# Altium PCB GateWay.PcbDoc (part 2 of 2)
Units mil, origin at the board's own origin, x right, y up, seen from the top; angles counter-clockwise.
Board outline 3543.31 x 4133.86 mil, 2 copper layers (Top Layer, Bottom Layer); 164 components, 130 nets, 591 pads, 370 vias.
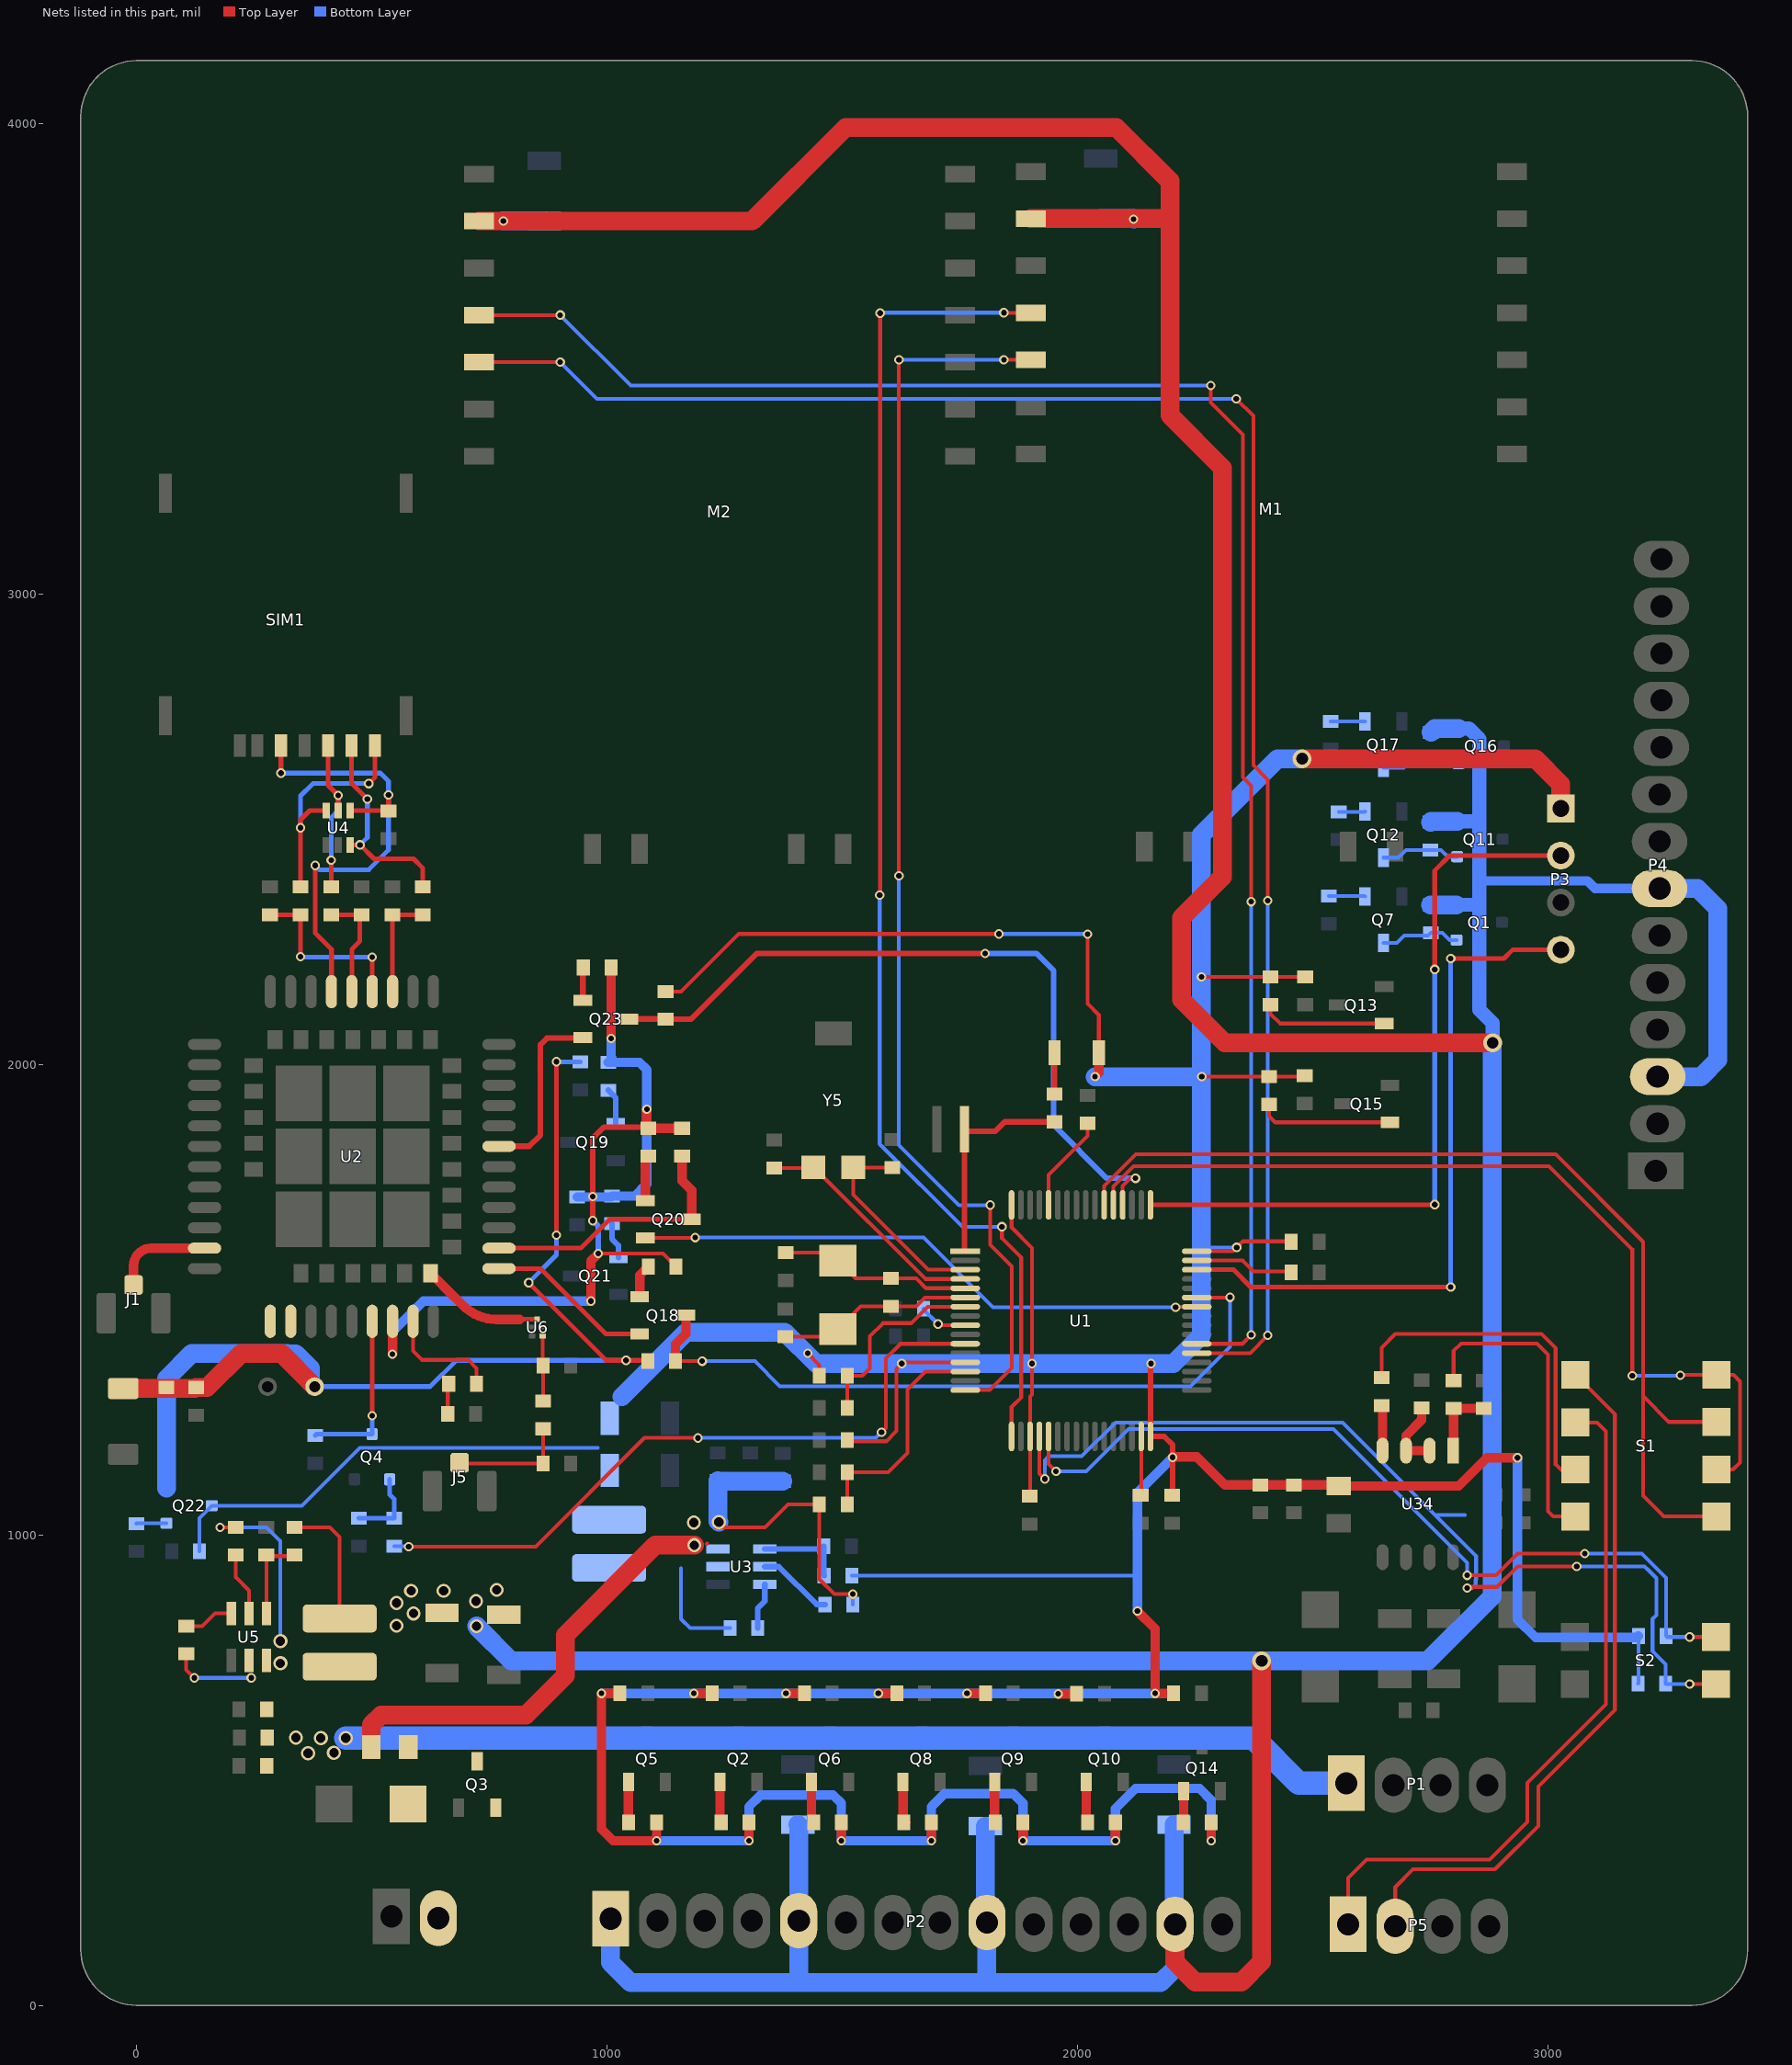
[diagram p2: the nets of this part, all layers, seen from the top]

## Via types
v1: diameter 30, hole 20, Top Layer to Bottom Layer, tented both sides, 220 vias
v2: diameter 20, hole 12, Top Layer to Bottom Layer, tented both sides, 147 vias
v3: diameter 40, hole 25, Top Layer to Bottom Layer, tented both sides, 3 vias

## Nets (pads, with @x,y where several pads share a name; then routed paths per layer and width w, separated by ;. In a path a pad name is that pad's centre, name@x,y a point inside that pad or via, vN(x,y) a via of type N, cw(c..) or ccw(c..) an arc to the next point about the centre after c; other vN are vias at no path point) (continued)
LORA_RXD: M1.3 U1.16 | length 2679.9
  Top Layer w8: v2(1621,2401) v2(1621,3498) ; U1.16@1762,1307.72 1813.72,1307.72 1861,1355 1861,1571 1815,1617 v2(1815,1701) ; v2(1844,3498) 1844.1,3497.9 M1.3@1901.25,3497.9
  Bottom Layer w8: v2(1621,2401) 1621,1829 1749,1701 v2(1815,1701) ; v2(1621,3498) v2(1844,3498)
LORA_RXD2: M2.3 U1.37 | length 3827.1
  Top Layer w8: M2.3@728.25,3492.9 v2@900.9,3492.9 ; U1.37@2254.13,1386.46 2367.46,1386.46 v2(2405,1424) ; v2(2338,3415) 2374.53,3378.47 2374.53,2636 2405,2605.53 v2(2405,2348)
  Bottom Layer w8: v2(901,3493) 979,3415 v2(2338,3415) ; v2(2405,1424) v2(2405,2348)
LORA_TXD: M1.4 U1.17 | length 2891.2
  Top Layer w8: v2(1580,2360) 1581,2361 v2(1581,3597) ; v2(1840,1655) 1840,1630 1881,1589 1881,1492.55 1881,1292.57 1860.43,1272 U1.17@1860.43,1209.3 ; v2(1844,3598) 1844.1,3597.9 M1.4@1901.25,3597.9
  Bottom Layer w8: v2(1580,2360) 1580,1831 1756,1655 v2(1840,1655) ; v2(1581,3597) 1582,3598 v2(1844,3598)
LORA_TXD2: M2.4 U1.38 | length 3800.7
  Top Layer w8: M2.4@728.25,3592.9 v2@900.9,3592.9 ; U1.38@2254.13,1406.15 2351.15,1406.15 v2(2370,1425) ; v2(2284,3443) 2284,3407 2352,3339 2352,2610 2370,2592 v2(2370,2346) v2@2374,2350
  Bottom Layer w8: v2(901,3593) 1051,3443 v2(2284,3443) ; v2(2370,1425) v2(2370,2346)
MODE1: R57.1 S2.3 U1.20 | length 2151.9
  Top Layer w8: U1.20@1919.48,1209.3 1919.48,1130.52 v2(1931,1119) ; v2(2829,887) 2831.37,889.37 2892.37,889.37 2936,933 v2(3062,933) ; v2(3302,683) S2.3@3358,683
  Bottom Layer w8: v2(1931,1119) 1931,1158.83 1939.17,1167 2009.59,1167 2081.59,1239 2174,1239 ; 2200,1239 2174,1239 ; 2824,1042 2760.81,1042 ; v2(2829,887) 2840,887 2847,894 2847,904.13 2848,905.13 2848,954.81 2760.81,1042 ; v2(3062,933) 3206,933 3215.26,923.74 3231,908 3231,829 3223,821 3223,753 3251,725 R57.1@3251,684 3252,683 v2(3302,683) ; 2174,1239 2563.81,1239 2760.81,1042
MODE2: R56.1 S2.4 U1.21 | length 1830.4
  Top Layer w8: U1.21@1939.17,1209.3 1939.17,1150.83 v2(1955,1135) ; v2(2829,914) 2890,914 2936,960 v2(3079,960) ; v2(3302,783) S2.4@3358,783
  Bottom Layer w8: v2(1955,1135) 2018.96,1135 2108.96,1225 2545,1225 2829,941 v2(2829,914) ; v2(3079,960) 3200.32,960 3252,908.32 R56.1@3252,785 3254,783 v2(3302,783)
NBIOT_RXD1: Q18.3 R42.1 U1.43 | length 1519.1
  Top Layer w8: R42.1@1145.98,1369.19 v2(1202.81,1369.19) v2@1203,1369 ; U1.43@2254.13,1504.57 2324.57,1504.57 v2(2325,1505)
  Top Layer w20: R42.1@1145.98,1369.19 1145.98,1404.98 1168.4,1427.4 Q18.3@1168.4,1466.82
  Bottom Layer w8: v2(1202.81,1369.19) 1314.81,1369.19 1368,1316 2241,1316 2325,1400 v2(2325,1505)
NBIOT_TXD1: Q20.2 U1.42 | length 1234.1
  Top Layer w8: Q20.2@1081.98,1631.45 1187.45,1631.45 v2(1188,1632) ; v2(2209,1484) 2209.89,1484.89 U1.42@2254.13,1484.89
  Bottom Layer w8: v2(1188,1632) 1673,1632 1821,1484 v2(2209,1484)
NET_LIGHT: LED3.1 U2.41 | length 246.2
  Top Layer w8: U2.41@587.91,1453.98 587.91,1391.09 607,1372 705,1372 722.98,1354.02 LED3.1@722.98,1321.19
NetC1_2: C1.2 R34.2 U1.6 Y1.2 | length 417.6
  Top Layer w8: C1.2@1379,1420.94 1474.61,1420.94 Y1.2@1491,1437.33 1539.61,1485.94 R34.2@1604,1485.94 1657.94,1485.94 1676.57,1504.57 U1.6@1762,1504.57
NetC2_2: C2.2 R34.1 U1.5 Y1.1 | length 413.4
  Top Layer w8: C2.2@1380,1600.06 1473.94,1600.06 Y1.1@1491,1583 1529,1545 R34.1@1604,1545 1658,1545 1678.74,1524.26 U1.5@1762,1524.26
NetC7_2: C7.2 U1.31 | length 125.7
  Top Layer w8: C7.2@2135,1084.06 2136.02,1085.07 U1.31@2136.02,1209.3
NetC10_1: C10.1 J5.1 R17.2 | length 252.1
  Top Layer w8: J5.1@686.98,1153.23 688.82,1151.39 C10.1@864.32,1151.39 R17.2@864.32,1225.33
NetC15_2: C15.2 U1.3 Y5.1 | length 445
  Top Layer w8: C15.2@1607,1780.94 1606.94,1781 Y5.1@1524,1781 1524,1723 1683.37,1563.63 U1.3@1762,1563.63
NetC19_2: C19.2 U1.47 | length 211.3
  Top Layer w8: U1.47@2254.13,1583.32 2351.68,1583.32 2375,1560 2452.94,1560 C19.2@2454.94,1558
NetC20_2: C20.2 U1.4 Y5.2 | length 504.6
  Top Layer w8: C20.2@1356,1779.94 1437.94,1779.94 Y5.2@1439,1781 1440.38,1781 1677.44,1543.94 U1.4@1762,1543.94
NetC23_1: C23.1 R17.1 U6.4 | length 139.2
  Top Layer w8: U6.4@863.64,1423.3 863.64,1360.07 C23.1@864.32,1359.39 R17.1@864.32,1284.39
NetC29_1: C29.1 L2.1 U3.2 | length 219.9
  Bottom Layer w8: 1158,929 1158,821 1177,802 C29.1@1262,802
NetC29_2: C29.2 U3.6 | length 99.2
  Bottom Layer w12: C29.2@1321.06,802 C29.2@1321.06,802 1321,844 1336,859 U3.6@1336,895
NetC35_1: C35.1 L1.1 U5.2 | length 183.3
  Top Layer w8: C35.1@106,747 106,713 v2(123,696) ; v2(244,696) v2@247,699
  Bottom Layer w8: v2(123,696) v2(244,696)
NetC35_2: C35.2 U5.6 | length 107.2
  Top Layer w8: C35.2@106,806.06 140.06,806.06 167,833 U5.6@202,833
NetD1_2: D1.2 F2.1 Q3.3
NetD2_2: D2.2 R8.1 | length 88.2
  Top Layer w12: D2.2@1951.51,2025 1952,2024.51 R8.1@1952,1937
NetJ1_1: J1.1 U2.32 | length 213.2
  Top Layer w20: J1.1@-6.02,1531.23 -6.02,1571.98 cw(c31.5,1572) 31.5,1609.5 U2.32@144.99,1609.5
NetLED3_2: LED3.2 R38.1 | length 64.8
  Top Layer w8: R38.1@661.98,1257.19 661.98,1319.24 LED3.2@663.92,1321.19
NetP5_1: P5.1 S1.6 | length 1501.3
  Top Layer w8: P5.1@2576,172 2576,271 2615,310 2877,310 2957,390 2957,473 3124,640 3124,1220 3105,1239 S1.6@3059,1239
NetP5_2: P5.2 S1.5 | length 1502.1
  Top Layer w8: P5.2@2676,168.06 2676,251 2714,289 2888,289 2980,381 2980,465 3143,628 3143,1256 S1.5@3059,1340
NetQ1_1: Q1.1 Q7.3 R31.1 | length 170.7
  Bottom Layer w8: Q7.3@2650.91,2258.57 2679.25,2258.57 2695,2274.32 2745.86,2274.32 R31.1@2751.54,2280 2776,2280 2791.4,2264.6 Q1.1@2806.31,2264.6
NetQ2_1: Q2.1 R1.1 | length 87
  Top Layer w20: Q2.1@1240.6,475 1240.6,391.51 R1.1@1243.11,389
NetQ4_1: Q4.1 R16.1 R18.1 | length 161.7
  Bottom Layer w10: R18.1@472.98,1035.19 R16.1@547.98,1035.19 547.98,1076.02 538.38,1085.62 Q4.1@538.38,1117.96
NetQ5_1: Q5.1 R24.1 | length 86.3
  Top Layer w20: Q5.1@1046,475 1046,389.61 R24.1@1046.61,389
NetQ6_1: Q6.1 R2.1 | length 87.8
  Top Layer w20: Q6.1@1435.2,475 1435.2,393.41 R2.1@1439.61,389
NetQ7_1: Q7.1 R3.2 | length 77.4
  Bottom Layer w8: R3.2@2534.54,2358.06 2610.48,2358.06 Q7.1@2611.54,2357
NetQ8_1: Q8.1 R4.1 | length 88.6
  Top Layer w20: Q8.1@1629.8,475 1629.8,395.31 R4.1@1636.11,389
NetQ9_1: Q9.1 R5.1 | length 77.8
  Top Layer w20: R5.1@1824.4,397.21 Q9.1@1824.4,475
NetQ10_1: Q10.1 R6.1 | length 75.9
  Top Layer w20: R6.1@2019,399.11 Q10.1@2019,475
NetQ11_1: Q11.1 Q12.3 R11.1 | length 169.6
  Bottom Layer w8: Q12.3@2650.91,2439.57 2682.25,2439.57 2698.68,2456 R11.1@2751,2456 2773,2456 2787.4,2441.6 Q11.1@2807.77,2441.6
NetQ12_1: Q12.1 R12.2 | length 55.9
  Bottom Layer w8: R12.2@2556,2537.06 2610.59,2537.06 Q12.1@2611.54,2538
NetQ13_1: Q13.1 R13.1 | length 270.1
  Top Layer w8: R13.1@2410.68,2127 2410.68,2107.32 2431,2087 Q13.1@2652.68,2087
NetQ14_1: Q14.1 R20.1 | length 66.2
  Top Layer w20: R20.1@2225.61,389 2226,389.39 Q14.1@2226,455
NetQ15_1: Q15.1 R21.1 | length 287.2
  Top Layer w8: R21.1@2407.68,1915 2407.68,1890.32 2421.06,1876.94 Q15.1@2664.68,1876.94
NetQ16_1: Q16.1 Q17.3 R30.1 | length 169.7
  Bottom Layer w8: Q17.3@2650.91,2630.57 2694.21,2630.57 2709.96,2646.32 2751.32,2646.32 R30.1@2752,2647 2803.37,2647 Q16.1@2810.77,2639.6
NetQ17_1: Q17.1 R32.2 | length 72.6
  Bottom Layer w8: R32.2@2539,2729.06 2611.48,2729.06 Q17.1@2611.54,2729
NetQ18_1: Q18.1 R40.1 | length 71.5
  Top Layer w20: Q18.1@1069.98,1506.19 1069.98,1552.19 R40.1@1087.98,1570.19
NetQ19_1: Q19.1 R41.1 | length 77.6
  Bottom Layer w12: R41.1@1002.98,1945.19 1018.98,1929.19 Q19.1@1018.98,1874.19
NetQ20_1: Q20.1 R44.1 | length 97.5
  Top Layer w20: Q20.1@1081.98,1710.19 1081.98,1799.19 R44.1@1087.98,1805.19
NetQ21_1: Q21.1 R45.1 | length 77.1
  Bottom Layer w12: R45.1@1010.98,1661.19 1010.98,1629.02 1024.53,1615.47 Q21.1@1024.53,1589.69
NetQ22_1: Q22.1 R52.2 | length 64
  Bottom Layer w8: R52.2@0,1024.06 0.54,1024.6 Q22.1@63.77,1024.6
NetQ23_1: Q23.1 R61.1 | length 70.4
  Top Layer w12: Q23.1@949,2136 949,2205 R61.1@950,2206
NetQ23_3: Q23.3 R62.1 U1.52 | length 1599.3
  Top Layer w8: U1.52@2096.65,1701.43 2096.65,1741.65 2113,1758 v2(2124,1758)
  Top Layer w12: Q23.3@1047.43,2096.63 1124.37,2096.63 R62.1@1125,2096 1178.95,2096 1318.95,2236 v2(1804,2236)
  Bottom Layer w12: v2(1804,2236) 1913,2236 1950,2199 1950,1871 2063,1758 v2(2124,1758)
NetR8_2: R8.2 SBatery.2 U1.1 | length 461
  Top Layer w12: U1.1@1762,1603 1760.5,1604.5 SBatery.2@1760.5,1862 1764.5,1858 1826,1858 1845.94,1877.94 R8.2@1952,1877.94
NetR14_2: R14.2 R33.1 U1.14 | length 486.9
  Top Layer w8: R14.2@1511,1065 R33.1@1511,1133.25 1598.25,1133.25 1639,1174 1639,1309 1677.09,1347.09 U1.14@1762,1347.09
NetR23_2: R23.2 SIM1.2 U4.5 | length 348.4
  Top Layer w10: SIM1.2@407.4,2678 407.4,2593.6 v2(429,2572) U4.5@429,2539.63 ; R23.2@413.98,2377.19 v2@413.98,2434
  Bottom Layer w10: v2(414,2434) 414,2524.63 428.98,2539.61 v2@428.98,2571.98
NetR25_2: R25.2 SIM1.7 U4.3 | length 446.5
  Top Layer w10: U4.3@454.57,2466.77 v2(475.23,2466.77) 505,2437 589,2437 608.98,2417.02 R25.2@608.98,2377.19 ; SIM1.7@457.4,2678 457.4,2597.6 v2(491,2564)
  Bottom Layer w10: v2(475.23,2466.77) 491,2482.54 v2(491,2564)
NetR29_2: R29.2 R48.2 U3.4 | length 190.9
  Bottom Layer w12: U3.4@1336,969.8 1454.75,969.8 R48.2@1460.94,976 1460.94,914 R29.2@1461.94,913
NetR35_1: R35.1 U1.60 | length 207.9
  Top Layer w8: U1.60@1939.17,1701.43 1939.17,1762 1939.17,1765.17 2022,1848 R35.1@2022,1875
NetR39_2: R39.2 SIM1.3 U4.6 | length 516.7
  Top Layer w10: R39.2@348.98,2377.19 348.98,2519.98 368.61,2539.61 U4.6@403.39,2539.61 ; v2(494,2597) 507.4,2610.4 SIM1.3@507.4,2678
  Bottom Layer w10: v2@348.98,2502 348.98,2570.98 375,2597 v2(494,2597)
  other v2: 348.98,2503
NetR49_2: R49.2 U3.5 | length 161.2
  Bottom Layer w12: U3.5@1336,932.4 1365.6,932.4 1446,852 R49.2@1463.94,852
NetR50_2: R50.2 R51.2 U5.4 | length 184.5
  Top Layer w8: U5.4@276.8,833 276.8,952.14 274,954.94 334,954.94 R50.2@335,955.94
NetR53_1: R53.1 U5.5 | length 135.8
  Top Layer w8: R53.1@211,957 211,910 239.4,881.6 U5.5@239.4,833
NetR55_1: R55.1 U34.4 | length 96.8
  Top Layer w20: R55.1@2647,1275 2649,1273 U34.4@2649,1179
NetR55_2: R55.2 S1.7 | length 754.4
  Top Layer w8: R55.2@2647,1334.06 2647,1398 2676,1427 2987,1427 3017,1397 3017,1150 3031,1136 3056,1136 S1.7@3059,1139
NetR58_1: R58.1 U34.2 U34.3 | length 154.7
  Top Layer w20: R58.1@2732,1270 2732,1244 2699,1211 U34.3@2699,1179 U34.2@2749,1179
NetR60_2: R60.2 U1.9 | length 104.7
  Top Layer w8: v2(1704.15,1448.15) 1706.78,1445.52 U1.9@1762,1445.52
  Bottom Layer w8: R60.2@1673.06,1481 1673.06,1479.24 v2(1704.15,1448.15)
NetR137_1: R137.1 R218.1 U34.1 | length 154.4
  Top Layer w20: U34.1@2799,1179 2800,1180 R218.1@2800,1269 R137.1@2864,1269
NetR218_2: R218.2 S1.8 | length 676.1
  Top Layer w8: R218.2@2800,1328.06 2800,1391 2816,1407 2977,1407 3001,1383 3001,1050 3012,1039 S1.8@3059,1039
NetU2_68: U2.68 U6.1 | length 263.6
  Top Layer w10: 815,1458 cw(c816.77,1456.23) 816.77,1458.73 U6.1@852.32,1458.73
  Top Layer w20: U2.68@625.31,1556.35 675.65,1506 676,1506 694.71,1487.29 ccw(c765.42,1558) 765.42,1458 815,1458
PWRKEY: Q4.3 R37.1 U2.39 | length 362.4
  Top Layer w10: v2@501,1253 v2(501.29,1253.29) U2.39@501.29,1453.98
  Bottom Layer w10: R37.1@379.98,1211.19 383.2,1214.42 Q4.3@500.98,1214.42 500.98,1252.98 v2(501.29,1253.29)
RI: Q23.2 U2.7 | length 386.3
  Top Layer w12: U2.7@770.98,1826.03 835.03,1826.03 859,1850 859,2042 873,2056 947.74,2056 Q23.2@949,2057.26
RS485_RXD1: S1.1 S1.3 U1.54 | length 2183.7
  Top Layer w8: U1.54@2057.28,1701.43 2057.28,1741.28 2125,1809 3017,1809 3203,1623 3203,1295 ; S1.1@3359,1039 3247,1039 3203,1083 3203,1295 ; S1.3@3359,1240 3258,1240 3203,1295
RS485_TXD1: S1.2 S1.4 U1.53 | length 1966.6
  Top Layer w8: U1.53@2076.96,1701.43 2076.96,1740.96 2120,1784 3003,1784 3180,1607 v2(3180,1338) ; v2(3282,1339) 3283,1340 S1.4@3359,1340 3395,1340 3409,1326 3409,1154 3394,1139 S1.2@3359,1139
  Bottom Layer w8: v2(3180,1338) 3281,1338 v2(3282,1339)
RST: C13.2 R15.2 U1.7 | length 419.9
  Top Layer w8: C13.2@1511,1269.75 R15.2@1511,1338 1543,1338 1559,1354 1559,1422 1587,1450 1647,1450 1681.89,1484.89 U1.7@1762,1484.89
SIM_CLK: C17.2 R39.1 U2.16 | length 379.9
  Top Layer w10: C17.2@283.98,2318.13 R39.1@348.98,2318.13 v2@348.98,2229.02 ; v2(501,2228) 501.29,2227.71 U2.16@501.29,2154.77
  Bottom Layer w10: v2(349,2229) 350,2228 v2(501,2228)
SIM_DATA: C18.2 R25.1 U2.15 | length 228.6
  Top Layer w10: U2.15@544.6,2154.77 543.98,2155.39 C18.2@543.98,2318.13 R25.1@608.98,2318.13
SIM_PWR: R16.2 U1.11 | length 1479.8
  Top Layer w8: v2(579,975) 849,975 1080,1206 v2(1194,1206) ; v2(1584,1218) 1593,1227 1593,1375 1624.15,1406.15 U1.11@1762,1406.15
  Bottom Layer w8: R16.2@547.98,976.13 577.87,976.13 v2(579,975) ; v2(1194,1206) 1572,1206 v2(1584,1218)
SIM_RST: C16.2 R23.1 U2.17 | length 237.1
  Top Layer w10: R23.1@413.98,2318.13 C16.2@478.98,2318.13 475,2314.16 475,2262 457.98,2244.98 U2.17@457.98,2154.77
SIM_RXD: Q20.3 R46.1 U2.2 | length 577.7
  Top Layer w10: U2.2@770.98,1609.5 944.82,1609.5 1006.14,1670.82 Q20.3@1180.4,1670.82
  Top Layer w20: R46.1@1159.98,1805.19 1159.98,1753.02 1180.4,1732.6 Q20.3@1180.4,1670.82
SIM_TXD: Q18.2 U2.1 | length 356.5
  Top Layer w10: U2.1@770.98,1566.19 858.81,1566.19 997.55,1427.45 Q18.2@1069.98,1427.45
SIM_VBAT: C6.1 C9.2 C24.2 D3.2 Q22.2 R42.2 R43.2 U2.34 U2.35 | length 2637
  Top Layer w10: v2(834,1536) 999,1371 v2(1041,1371) 1085.11,1371 R42.2@1086.92,1369.19 ; v2(893,1637) v2(893,2006)
  Top Layer w40: D3.2@-28.02,1311.19 124.92,1311.19 C9.2@126.98,1313.24 150.24,1313.24 223,1386 308.16,1386 C6.1@378.98,1315.19
  Bottom Layer w10: C6.1@378.98,1315.19 624.46,1315.19 680.27,1371 v2(1041,1371) ; v2(834,1536) 893,1595 v2(893,1637) ; v2(893,2006) 893.76,2005.24 R43.2@943.98,2005.24
  Bottom Layer w40: Q22.2@63.77,1099.4 63.77,1331.77 118,1386 320,1386 321,1385 339,1385 370,1354 370,1324.17 C6.1@378.98,1315.19
SIM_VDD: C14.2 SIM1.1 U2.18 U4.4 | length 1016.3
  Top Layer w10: v2@307,2619 v2(307.4,2619.4) SIM1.1@307.4,2678 ; v2(380,2423) 380,2279.2 414.68,2244.52 U2.18@414.68,2154.77 ; U4.4@454.57,2539.61 535.45,2539.61 C14.2@536,2539.06 v2(536,2573)
  Bottom Layer w10: v2(307.4,2619.4) 518.6,2619.4 536,2602 v2(536,2573) 536,2456 494,2414 389,2414 v2(380,2423)
SWCLK: P3.2 U1.49 | length 1595.8
  Top Layer w10: U1.49@2155.7,1701.43 2759.43,1701.43 v2(2760,1702) ; v2(2760,2202) 2760,2412 2792,2444 P3.2@3028,2444
  Bottom Layer w10: v2(2760,1702) v2(2760,2202)
SWD: P3.4 U1.46 | length 1494.9
  Top Layer w10: U1.46@2254.13,1563.63 2332.38,1563.63 2369.01,1527 v2(2794,1527) ; v2(2794,2225) 2907,2225 2926,2244 P3.4@3028,2244
  Bottom Layer w10: v2(2794,1527) v2(2794,2225)
VCC: C25.2 C26.2 C32.2 C33.2 C34.2 C41.2 F2.2 P1.1 R14.1 R49.1 R53.2 U3.3 U5.3 | length 4229.4
  Top Layer w8: v2(178.06,1016.06) v2(178.06,1016.06) R53.2@211,1016.06 ; 1212,981 1213,982 ; v1@1232,1016 1336,1016 1385,1065 R14.1@1451.94,1065 1451.94,906.06 1484,874 v2(1523,874)
  Top Layer w40: F2.2@499.26,549 499.26,596.26 520,617 828,617 912,701 912,787 1103,978 v1(1186,978)
  Bottom Layer w8: v2(178.06,1016.06) 276.94,1016.06 306,987 v1(306,774) ; R49.1@1523,852 v2(1523,874)
  Bottom Layer w40: v1(1238,1027) 1236,1029 C26.2@1236,1115 1237,1114 C25.2@1374,1114
  Bottom Layer w50: v1(445,568) 2375,568 2471,472 P1.1@2572,472
  other v1: 365,536 420,537 392,568 339,569 306,727 1185,1026
VCC5V_OUT: C4.1 C5.1 C21.1 C22.1 C30.1 C31.1 C40.1 L1.2 M1.6 M2.6 P2.1 P2.5 P2.9 P2.13 P4.3 P4.7 Q1.2 Q11.2 Q16.2 R11.2 R30.2 R31.2 R50.1 | length 13687.3
  Top Layer w8: R50.1@336,1016 411,1016 432,995 L1.2@432,822.18
  Top Layer w40: M2.6@728.25,3792.9 1309,3792.9 1508.1,3992 2083,3992 2197,3878 2197,3793 ; M1.6@1901.25,3797.9 2110,3797.9 ; 2155.1,3797.9 2110,3797.9 ; P2.13@2208,172.19 2208,92 2251,49 2349,49 2392,92 v3(2392,732) ; 2222,2263 2222,2138 ; v3(2883,2046) 2314,2046 2222,2138 ; 2110,3797.9 2192.1,3797.9 2197,3793 ; 2197,3793 2197,3380 2309,3268 2309,2399 2222,2312 2222,2138
  Bottom Layer w20: 2855,2396 2861,2390 3085,2390 3101,2374 P4.7@3237.87,2374
  Bottom Layer w30: Q1.2@2806.31,2339.4 2849.4,2339.4 2855,2345 ; Q11.2@2807.77,2516.4 2854.4,2516.4 2855,2517 ; Q16.2@2810.77,2714.4 2832.6,2714.4 2855,2692 2855,2517 ; v3(2883,2046) 2883,2088 2855,2116 2855,2345 ; 2855,2345 2855,2396 2855,2517
  Bottom Layer w40: v1(723,806) 797,732 v3(2392,732) 2745,732 2882,869 2882,2045 v3(2883,2046) ; v2(780,3793) C22.1@867,3793 ; P2.1@1008,184 1008,91 1051,48 1418,48 ; C4.1@1406,384 1408,382 P2.5@1408,180.06 1408,58 1418,48 ; C40.1@1805,381 1805,179.13 P2.9@1808,176.13 1808,53 1813,48 ; C21.1@2050,3798 2119,3798 v2(2120,3797) ; C5.1@2205.93,384 2205.93,174.26 P2.13@2208,172.19 2208,81 2209,80 2177,48 1813,48 ; R11.2@2751,2515.06 2752.35,2516.4 Q11.2@2807.77,2516.4 ; R31.2@2751.54,2339.06 2751.88,2339.4 Q1.2@2806.31,2339.4 ; R30.2@2752,2706.06 2760.35,2714.4 Q16.2@2810.77,2714.4 ; P4.7@3237.87,2374 3319,2374 3362,2331 3362,2010 3326,1974 P4.3@3233.94,1974 P4.3@3241.94,1982 ; 1418,48 1813,48
  other v1: 553,807 589,833 553,855 722,859 584,881 653,881 766,883
VCC_3.3V: C3.2 C8.2 C11.2 C12.2 C27.1 C28.1 C89.2 C90.2 D2.1 FB6.2 L2.2 P3.1 Q22.3 R1.2 R2.2 R4.2 R5.2 R6.2 R7.2 R9.2 R10.2 R13.2 R15.1 R19.2 R20.2 R21.2 R22.2 R24.2 R26.2 R27.2 R28.2 R29.1 R36.2 R54.2 R56.2 R57.2 R62.2 U1.13 U1.19 U1.32 U1.48 U1.64 | length 14409.5
  Top Layer w8: R62.2@1125,2155.06 1158.02,2155.06 1280.45,2277.48 v2(1833.52,2277.48) v2@1834,2277 ; v2(1427,1386) 1451.94,1361.06 R15.1@1451.94,1338 ; C8.2@1511,1201.5 1513.5,1199 1594,1199 1616,1221 1616,1353 v2(1627,1364) ; v2@1631.78,1366.78 U1.13@1762,1366.78 ; U1.64@1860.43,1701.43 1860.43,1653.57 1904,1610 v2(1904,1364) 1904,1298.2 1899.8,1294 U1.19@1899.8,1209.3 1899.8,1082.85 C3.2@1899,1082.06 ; v2(2022,2277) 2022,2129 2046,2105 D2.1@2046,2025 ; U1.48@2254.13,1603 2331,1603 ; v2(2264.06,2186.06) R13.2@2410.68,2186.06 R22.2@2484.68,2186.06 ; v2(2264.94,1974.06) R21.2@2407.68,1974.06 2481.68,1974.06 R28.2@2483.68,1976.06 ; v2(2339.08,1611.08) 2352,1624 2453.94,1624 C12.2@2454.94,1623
  Top Layer w12: v2@2155.7,1363.7 U1.32@2155.7,1209.3 2184.7,1209.3 2203,1191 2203,1166 v2(2203,1165) 2203,1085.06 C11.2@2202,1084.06
  Top Layer w20: R7.2@1027.94,663 v2(988.61,663) 988.61,374.39 1013.33,349.67 v2(1105.67,349.67) R24.2@1105.67,389 ; v2(1184.78,663) R19.2@1224.11,663 ; v2(1302.17,349.67) R1.2@1302.17,389 ; v2(1380.94,663) R26.2@1420.28,663 ; v2(1498.67,349.67) R2.2@1498.67,389 ; v2(1577.11,663) R36.2@1616.44,663 ; v2(1690.17,349.67) R4.2@1690.17,389 ; v2(1765.61,663) R9.2@1804.94,663 ; v2(1884.67,349.67) R5.2@1884.67,389 ; v2(1959.61,662) R10.2@1998.94,662 ; v2(2038,1974.06) 2046,1982.06 D2.1@2046,2025 ; v2(2081.17,349.67) R6.2@2081.17,389 ; v2(2128,838) 2165.61,800.39 v2(2165.61,663) R27.2@2204.94,663 ; v2@2203,1166 2254,1166 2313.94,1106.06 C89.2@2389,1106.06 C90.2@2461,1106.06 2553.69,1106.06 FB6.2@2556,1103.74 2810.74,1103.74 2871,1164 v2(2936,1164) ; v2(2284.67,349.67) R20.2@2284.67,389
  Top Layer w40: v3(2478,2650) 2974,2650 3028,2596 P3.1@3028,2544
  Bottom Layer w8: R54.2@134.06,965 134.06,1035.83 Q22.3@160.23,1062 352,1062 475,1185 981,1185 ; R29.1@1521,913 2119,913 2128,904 ; v2(1833.52,2277.48) 2021.52,2277.48 v2(2022,2277) ; 2266.92,1611.08 v2(2339.08,1611.08) ; R57.2@3191.94,684 3192.94,685 R56.2@3192.94,785
  Bottom Layer w20: v2(988.61,663) v2(1184.78,663) v2(1380.94,663) v2(1577.11,663) v2(1765.61,663) v2(2165.61,663) ; v2(1105.67,349.67) v2(1302.17,349.67) 1302.17,422.17 1327,447 1481,447 1498.67,429.33 v2(1498.67,349.67) v2(1690.17,349.67) 1690.17,422.17 1718,450 1864,450 1884.67,429.33 v2(1884.67,349.67) v2(2081.17,349.67) 2081.17,418.17 2124,461 2260,461 2284.67,436.33 v2(2284.67,349.67) ; v2(2128,838) 2128,904 2128,1090 v2(2203,1165) ; v2(2936,1164) 2936,820.32 2974.37,781.94 3189.89,781.94 R56.2@3192.94,785
  Bottom Layer w40: 1032,1294 1169,1431 1378,1431 1445,1364 v2(1627,1364) v2(1904,1364) v2(2157,1364) 2204,1364 2264,1424 v2@2264,1974.06 ; v2(2038,1974.06) v2@2264,1974.06 ; v3(2478,2650) 2426,2650 2264,2488 v2@2264,1974.06
VCC_IN: P6.2 Q3.2
VDD_EXT: R40.2 R41.2 R44.2 R45.2 R46.2 R47.2 R61.2 U2.40 | length 2035.1
  Top Layer w8: v2(982,1598) 1119.22,1598 R40.2@1147.03,1570.19
  Top Layer w12: v2(970,1668) v2(970,1719) 970,1843 994,1867 1085.22,1867 R44.2@1087.98,1864.24
  Top Layer w20: v2(544,1384) 544.6,1384.6 U2.40@544.6,1453.98 ; v2(966,1497) 966,1582 v2(982,1598) ; v2(1009.06,2055.06) v2(1009.06,2055.06) R61.2@1009.06,2206 ; v2(1085,1905) 1085,1867.22 R44.2@1085.22,1867 ; R44.2@1087.98,1864.24 R46.2@1159.98,1864.24
  Bottom Layer w12: v2(970,1668) 982,1656 v2(982,1598)
  Bottom Layer w20: v2(544,1384) 544,1431 610,1497 v2(966,1497) ; R47.2@936.98,1718.24 1008.98,1718.24 R45.2@1010.98,1720.24 1059.24,1720.24 1085,1746 v2(1085,1905) 1085,1989 1069.76,2004.24 R41.2@1002.98,2004.24 1009.06,2010.32 v2(1009.06,2055.06)
pads on no net: M1.8 M1.9 M1.10 M1.11 M1.12 M1.13 M1.14 M1.18 M2.8 M2.9 M2.10 M2.11 M2.12 M2.13 M2.14 M2.18 P4.13 P5.4 SIM1.6 SIM1.8 U1.2 U1.8 U1.22 U1.41 U1.44 U1.45 U1.50 U1.51 U1.62 U2.3 U2.4 U2.5 U2.9 U2.10 U2.11 U2.12 U2.14 U2.20 U2.22 U2.23 U2.24 U2.25 U2.26 U2.28 U2.29 U2.38 U2.42 U2.43 U2.44 U2.46 U2.47 U2.48 U2.49 U2.50 U2.51 U2.52 U2.53 U2.54 U2.55 U2.56 U2.57 U2.58 U2.59 U2.60 U2.63 U2.64 U2.65 U4.1 Y5.3

## Polygon pours and split planes (outlines as drawn)
AGND on Top Layer "Top Layer-No Net" (solid, remove dead copper): -337,4408 -327,4418 3649,4418 3649,-498 3667,-516 -567,-516 -567,4086 -217,4436
AGND on Bottom Layer "Top Layer-No Net" (solid, remove dead copper): -602,4469 -587,4484 3574,4484 3574,-279 3460,-393 3303,-236 -573,-236 -573,551 -559,565 -444,680 -444,4527

## Keep-outs
Keep-Out Layer:
  circle w2.5: c0,4133.86 r1.25
  circle w2.5: c-118.11,3499.67 r1.25
  circle w2.5: c275.59,3740.16 r1.25
  circle w2.5: c3289.93,3987.6 r1.25
  lines w5: -118.11,3479.99 -118.11,3663.26 ; -118.11,118.11 ccw(c0,118.11) 0,0 ; -118.11,118.11 ccw(c0,118.11) 0,0 ; -118.11,118.11 -118.11,4015.75 ; -118.11,118.11 -118.11,393.7 275.59,393.7 275.59,0 0,0 ; -118.11,4015.75 cw(c0,4015.75) 0,4133.86 ; -118.11,4015.75 cw(c0,4015.75) 0,4133.86 ; -118.11,4015.75 -118.11,3740.16 275.59,3740.16 275.59,4133.86 0,4133.86 ; 0,0 3307.09,0 ; 0,4133.86 3307.09,4133.86 ; 3307.09,0 ccw(c3307.09,118.11) 3425.2,118.11 ; 3307.09,0 ccw(c3307.09,118.11) 3425.2,118.11 ; 3307.09,0 3031.5,0 3031.5,393.7 3425.2,393.7 3425.2,118.11 ; 3307.09,4133.86 cw(c3307.09,4015.75) 3425.2,4015.75 ; 3307.09,4133.86 cw(c3307.09,4015.75) 3425.2,4015.75 ; 3307.09,4133.86 3031.5,4133.86 3031.5,3740.16 3425.2,3740.16 3425.2,4015.75 ; 3425.2,118.11 3425.2,4015.75

## Other copper
Top Layer:
  rectangle net VCC: 1170,959 1262,1042
  rectangle net VCC5V_OUT: 354,788 844,900
  rectangle net VCC: 266,708 336,789
  rectangle net VCC: 257,490 319,653
  rectangle net VCC: 262,520 520,586
  rectangle net NetD1_2: 536,382 620,582
  region net SIM_VBAT: 273,1495 338,1495 343,1490 343,1407 421,1329 421,1300 406.18,1285.18 349.82,1285.18 338,1297 338,1345 262,1421 262,1484
  region net NetC35_1: 228,760 252,760 252,753 253,752 253,705 259,699 341,699 346,704 346,747 356,757 506,757 514,749 514,685 506,677 235,677 227,685 227,759
  region net NetD1_2: 555,582 736,582 736,491 563,491 546,508 546,573
  region net VCC_IN: 676,115 676,116 694,134 694,204 796,306 796,454 740,454 727,441 727,380 592,245 592,125 602,115
Bottom Layer:
  rectangle net VCC5V_OUT: 524,787 803,899
  rectangle net VCC: 1170,959 1262,1042
  rectangle net VCC: 290,514 522,591
  rectangle net VCC: 290,517 361,792
  region net VCC_3.3V: 932,1001 1093,1001 1099,1007 1099,1054 1044,1109 1044,1329 1038,1335 1037,1334 969,1334 961,1326 961,1112 920,1071 920,1013
  region net NetC29_1: 1263,919 1267,923 1267,946 1265,948 1128,948 1109,967 931.6,967 917.6,953 917.6,899.85 928.45,889 1086,889 1116,919

## Silkscreen, mask and mechanical layers (free items; w line width, h text height)
Top Overlay:
  text "3.3V" at 2991,2615 h50
  text "SWCLK" at 2795,2430 h50
  text "GND" at 2855,2325 h50
  text "SWD" at 2855,2237 h50
  text "NBIOT" at 56,1387 h50
  text "GPS" at 494,1074 h50
  text "VBAT" at 621,319 h50
  text "GND" at 479,317 h50
Bottom Overlay:
  rectangle: 3185,1211.67 3236,1259.67
  rectangle: 3336,1211.67 3387,1259.67
  rectangle: 3185,1308 3236,1356
  rectangle: 3335,1308 3386,1356
  rectangle: 3185,1019 3236,1067
  rectangle: 3185,1115.33 3236,1163.33
  rectangle: 3332,1019 3383,1067
  rectangle: 3332,1115.33 3383,1163.33
  lines w5: 3163,1336 3131,1336 3131,1232 3166,1232 ; 3171,1142 3139,1142 3139,1038 3174,1038 ; 3223,1139 3354,1139 ; 3225,1043 3356,1043 ; 3228,1337 3359,1337 ; 3230,1240 3361,1240
  text "GND" at 3161,2864 h50
  text "GND" at 3164,2759 h50
  text "C3O" at 3155.2,2660 h50
  text "GND" at 3155.2,2560 h50
  text "C2O" at 3161,2455 h50
  text "5V" at 3151,2357 h50
  text "C1O" at 3155.2,2257 h50
  text "GND" at 3155.2,2157 h50
  text "C3OUT3" at 3148,2074 h50
  text "5V" at 3141,1963 h50
  text "C3OUT2" at 3144,1861 h50
  text "GND" at 3137,1750 h50
  text "UART" at 3105,1273 h50
  text "RS485" at 3113,1079 h50
  text "VBAT" at 2597,671 h50 r90
  text "GND" at 2890,650 h50 r90
  text "A" at 2799,643 h50 r90
  text "B" at 2685.07,638.93 h50 r90
  text "C1OUT2" at 1328,429 h50 r90
  text "GND" at 2030,424 h50 r90
  text "C1OUT1" at 1135,420 h50 r90
  text "C2OUT2" at 1932,420 h50 r90
  text "5V" at 1024,419 h50 r90
  text "C2OUT3" at 2127,417 h50 r90
  text "C2OUT1" at 1729,415 h50 r90
  text "C3OUT1" at 2344,415 h50 r90
  text "C1OUT3" at 1528,411.99 h50 r90
  text "GND" at 1611.43,367.35 h50 r90
  text "GND" at 1240,349.67 h50 r90
  text "5V" at 1424,309 h50 r90
  text "5V" at 2226,307 h50 r90
  text "5V" at 1821,306 h50 r90
  text "TXD" at 2690,103 h50 r90
  text "GND" at 2792,103 h50 r90
  text "RXD" at 2588,98 h50 r90
Mechanical 1:
  circle w5: c78.74,3956.69 r68.9
  circle w5: c3228.35,3956.69 r68.9
  circle w5: c3228.35,177.17 r68.9
  circle w5: c78.74,177.17 r68.9
  lines w5: -118.11,393.7 -118.11,118.11 ; -118.11,3479.99 -118.11,3663.26 ; -118.11,118.11 ccw(c0,118.11) 0,0 3307.09,0 ccw(c3307.09,118.11) 3425.2,118.11 3425.2,4015.75 ccw(c3307.09,4015.75) 3307.09,4133.86 0,4133.86 ccw(c0,4015.75) -118.11,4015.75 -118.11,118.11
Mechanical 7:
  circle w2.5: c0,4133.86 r1.25
  circle w2.5: c-118.11,3499.67 r1.25
  circle w2.5: c275.59,3740.16 r1.25
  circle w2.5: c3289.93,3987.6 r1.25

## Text inside footprints (layer, text, board x,y; h text height)
C6: Top Overlay "+" at 370.98,1255.19 h30
SBatery: Top Overlay "+" at 1781,1872 h40 r270